# EAGLE board talkie (EAGLE 9.1.0)
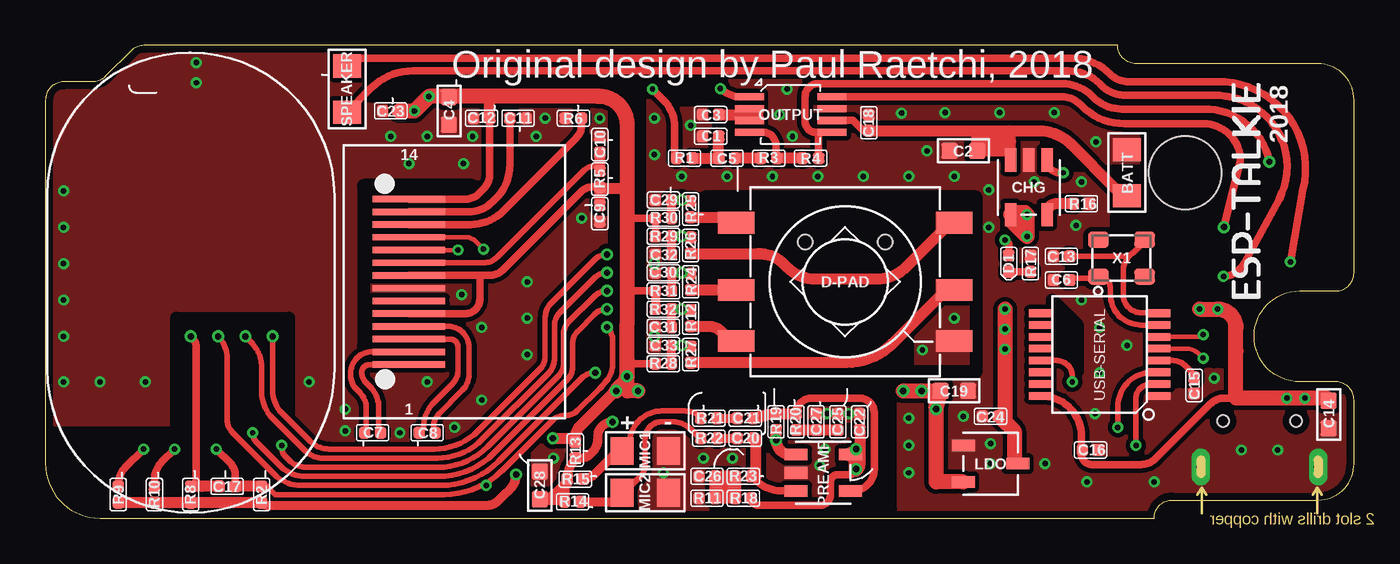
[diagram p0: board, top side]
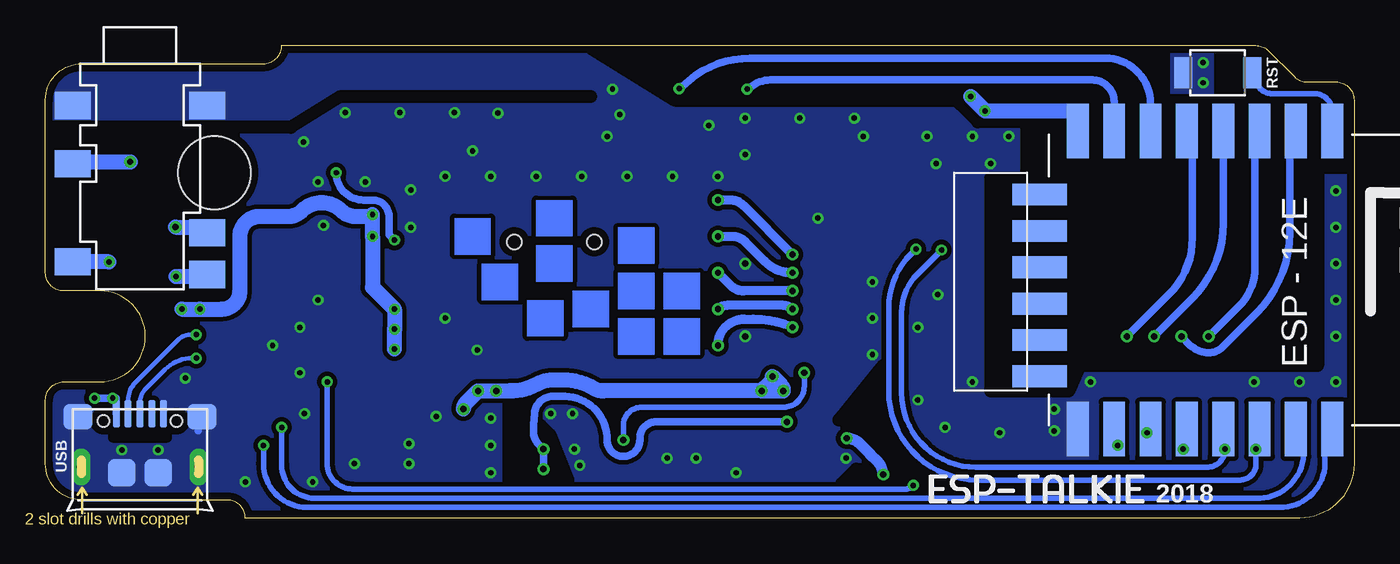
[diagram p1: board, bottom side, seen from below]

Size 72 x 26 mm. Coordinates in mm from the lower left corner, seen from the top.
Outline: 72,3 72,6.5 arc90 71,7.5 69,7.5 arc-180 69,12.5 71,12.5 arc90 72,13.5 72,23 arc90 70,25 60,25 arc-90 59,26 5.41,26 arc45 4.71,25.71 3.29,24.29 arc-45 2.59,24 1,24 arc90 0,23 0,3 arc90 3,0 61,0 arc-90 62,1 70,1 arc90 72,3
Copper layers (1*16): Top 0.035mm / dielectric 0.92mm / Bottom 0.035mm
Design rules "default *": minimum track width 6mil, minimum drill 0.3mm, track to track 6mil, track to pad 6mil, pad to pad 6mil, via to via 6mil, smd to smd 6mil, copper to edge 16mil, drill to drill 6mil, minimum pad ring 6mil, minimum via ring 6mil, stop-mask expansion 4mil, vias tented up to drill 0mil, thermal gap 10mil
Net classes: 1 usb: width 0.152 mm, clearance 0.305 mm to class 0, clearance 0.203 mm
Holes 4 mm at 62.7,19
tKeepout: area 16.4,5.5 to 28.6,20.5
bKeepout: area 21,0 to 62,26
tRestrict: 31 lines
bRestrict: 26 lines

## Footprints (pad centres in the part's own frame; a part is rotated, then mirrored left to right if it is on the bottom)
R1206 = smd 1.27 x 1.524: 1 -1.27,0; 2 1.27,0
C0402 = smd 0.635 x 0.635: 1 0,0.445; 2 0,-0.445
C0603 = smd 0.889 x 0.889: 1 0,0.762; 2 0,-0.762
SOT-23-5 = smd 0.635 x 1.27: 1 -1,-1.5; 2 0,-1.5; 3 1,-1.5; 4 1,1.5; 5 -1,1.5
LED-0402 = smd 0.635 x 0.635: + -0.445,0; - 0.445,0
DPAD-10X10 = smd 2 x 1.2: 1 -6,3.25; 2 -6,0.45; 3 -6,-3.25; 4 6,3.25; 5 6,0.45; 6 6,-3.25 | hole 0.8: -2.2,-2.2; 2.2,-2.2
PJ-342-6P = smd 1.5 x 2: 2 2.3,-3.7; 3 2.3,3.7; 4 5.5,-3.7; 5 10.9,-3.7; 6 9.3,3.7; 7 11.6,3.7
SOT-23-3 = smd 0.635 x 1.27: 1 -1,-1.5; 2 1,-1.5; 3 0,1.5
ER-OLED0.49 = smd 0.35 x 4: P$1 1.45,2; P$2 2.15,2; P$3 2.85,2; P$4 3.55,2; P$5 4.25,2; P$6 4.95,2; P$7 5.65,2; P$8 6.35,2; P$9 7.05,2; P$10 7.75,2; P$11 8.45,2; P$12 9.15,2; P$13 9.85,2; P$14 10.55,2
8-MSOP = smd 0.4 x 1.6: 1 -0.975,-2.275; 2 -0.325,-2.275; 3 0.325,-2.275; 4 0.975,-2.275; 5 0.975,2.275; 6 0.325,2.275; 7 -0.325,2.275; 8 -0.975,2.275
R0402 = smd 0.635 x 0.635: 1 0,0.445; 2 0,-0.445
SW2-2.6-3.0X2.5X1.2+0.4MM = smd 1 x 1.7: 1 -1.9,0; 2 1.9,0
ESP12E-SMD = smd 3 x 1.2: ADC -8.3,3.8; CH_PD -8.3,1.8; GND 8.1,-8.2; GPIO0 8.1,-2.2; GPIO2 8.1,-4.2; GPIO4 8.1,-0.2; GPIO5 8.1,1.8; GPIO12 -8.3,-4.2; GPIO13 -8.3,-6.2; GPIO14 -8.3,-2.2; GPIO15 8.1,-6.2; GPIO16 -8.3,-0.2; RESET -8.3,5.8; RXD0 8.1,3.8; TXD0 8.1,5.8; VCC -8.3,-8.2 | smd 1.2 x 3: CS0 -4.8,-10.3; GPIO9 -0.8,-10.3; GPIO10 1.2,-10.3; MISO -2.8,-10.3; MOSI 3.2,-10.3; SCLK 5.2,-10.3
MICRO-USB5+4P-SMD-0.65-B = smd 0.381 x 1.524: 1 -1.3,-0.25; 2 -0.65,-0.25; 3 0,-0.25; 4 0.65,-0.25; 5 1.3,-0.25 | smd 1.6 x 1.397: S1 -3.4,-0.427; S6 3.4,-0.427 | drill 0.508 pad 1.016 long: S2 -3.226,-3.175; S5 3.226,-3.175 | smd 1.5 x 1.5: S3 -1,-3.5; S4 1,-3.5 | hole 0.635: -2,-0.65; 2,-0.65
16-SSOP = smd 0.42 x 1.3: 1 -2.275,-3.25; 2 -1.625,-3.25; 3 -0.975,-3.25; 4 -0.325,-3.25; 5 0.325,-3.25; 6 0.975,-3.25; 7 1.625,-3.25; 8 2.275,-3.25; 9 2.275,3.25; 10 1.625,3.25; 11 0.975,3.25; 12 0.325,3.25; 13 -0.325,3.25; 14 -0.975,3.25; 15 -1.625,3.25; 16 -2.275,3.25
X4-SMD-3.2X2.5X0.7MM = smd 1.143 x 0.889: 1 -1.27,-1.016; 2 1.27,-1.016; 3 1.27,1.016; 4 -1.27,1.016

## Placement (x,y rotation side)
BATT  BATT  [R1206]  59.5,19 90 top
C1  10nF  [C0402]  36.6,21 90 top
C2  10uF  [C0603]  50.5,20.2 90 top
C3  1uF  [C0402]  36.6,22.2 270 top
C4  10uF  [C0603]  22.2,22.4 180 top
C5  390nF  [C0402]  37.5,19.8 90 top
C6  18pF  [C0402]  55.9,13.1 90 top
C7  1uF  [C0402]  18,4.7 90 top
C8  1uF  [C0402]  21,4.7 270 top
C9  4.7uF  [C0402]  30.5,16.75 0 top
C10  4.7uF  [C0402]  30.5,20.55 180 top
C11  4.7uF  [C0402]  26,22 270 top
C12  4.7uF  [C0402]  24,22 90 top
C13  18pF  [C0402]  55.9,14.4 90 top
C14  10uF  [C0603]  70.6,5.7 180 top
C15  100nF  [C0402]  63.2,7.3 180 top
C16  100nF  [C0402]  57.5,3.75 270 top
C17  100nF  [C0402]  10,1.75 90 top
C18  4.7uF  [C0402]  45.3,21.75 0 top
C19  10uF  [C0603]  50,7 90 top
C20  4.7uF  [C0402]  38.5,4.4 270 top
C21  4.7uF  [C0402]  38.5,5.5 270 top
C22  100nF  [C0402]  44.8,5.3 0 top
C23  100nF  [C0402]  19,22.4 90 top
C24  4.7uF  [C0402]  52,5.6 270 top
C25  4.7uF  [C0402]  43.6,5.3 0 top
C26  4.7uF  [C0402]  36.4,2.3 270 top
C27  4.7uF  [C0402]  42.4,5.3 180 top
C28  10uF  [C0603]  27.2,1.8 0 top
C29  100nF  [C0402]  34,17.5 270 top
C30  100nF  [C0402]  34,13.5 90 top
C31  100nF  [C0402]  34,10.5 270 top
C32  100nF  [C0402]  34,14.5 90 top
C33  100nF  [C0402]  34,9.5 270 top
CHG  MCP73831T-2ACI/OT  [SOT-23-5]  54.1,18.2 180 top
D1  LED  [LED-0402]  53,14 270 top
D-PAD  D-PAD  [DPAD-10X10]  44,13 180 top
JACK  PJ-342  [PJ-342-6P]  66.8,25 270 bottom
LDO  MCP1700T  [SOT-23-3]  52,3 270 top
MIC1  [R1206]  33,3.7 180 top
MIC2  [R1206]  33,1.4 0 top
OLED  ER-OLED0.49  [ER-OLED0.49]  22,7 90 top
OUTPUT  LM4890  [8-MSOP]  41,22.2 270 top
PREAMP  MCP6001UT-I  [SOT-23-5]  42.8,2.5 270 top
R1  2.2K  [C0402]  35.16,19.8 90 top
R2  10k  [R0402]  11.9,1.3 0 top
R3  20K  [R0402]  39.8,19.8 90 top
R4  20K  [R0402]  42.1,19.8 90 top
R5  10k  [R0402]  30.5,18.65 0 top
R6  390k  [R0402]  29.05,22 90 top
R8  10k  [R0402]  8,1.3 180 top
R9  10k  [R0402]  4,1.3 0 top
R10  10k  [R0402]  6,1.3 180 top
R11  20K  [R0402]  36.4,1.1 270 top
R12  1K  [R0402]  35.5,11 180 top
R13  33R  [R0402]  29.15,3.75 180 top
R14  1K  [R0402]  29,0.9 90 top
R15  1K  [R0402]  29.15,2.15 270 top
R16  2.2K  [R0402]  57,17.3 90 top
R17  470R  [R0402]  54.2,14 180 top
R18  20K  [R0402]  38.4,1.1 270 top
R19  100K  [R0402]  40.2,5.3 0 top
R20  1K  [R0402]  41.3,5.3 180 top
R21  1K  [R0402]  36.5,5.5 270 top
R22  1K  [R0402]  36.5,4.4 270 top
R23  20K  [R0402]  38.4,2.3 90 top
R24  1K  [R0402]  35.5,13 0 top
R25  1K  [R0402]  35.5,17 180 top
R26  1K  [R0402]  35.5,15 0 top
R27  1K  [R0402]  35.5,9 180 top
R28  100K  [R0402]  34,8.5 90 top
R29  100K  [R0402]  34,15.5 270 top
R30  100K  [R0402]  34,16.5 90 top
R31  100K  [R0402]  34,12.5 270 top
R32  100K  [R0402]  34,11.5 90 top
RST  [SW2-2.6-3.0X2.5X1.2+0.4MM]  7.5,24.5 0 bottom
SPEAKER  SPEAKER  [R1206]  16.6,23.6 270 top
U2  [ESP12E-SMD]  7,13 270 bottom
USB  [MICRO-USB5+4P-SMD-0.65-B]  66.8,6 0 bottom
USB-SERIAL  CH340G  [16-SSOP]  58,9 90 top
X1  12MHz  [X4-SMD-3.2X2.5X0.7MM]  59.2,14.3 0 top

## Library data of the parts
BATT MIC1 MIC2 R2-R6 R8-R11 R18 R23 SPEAKER = Seeed-OPL-Resistor
C1 R1 = Seeed-OPL-Capacitor; MPN: CC0402KRX7R9BB103
C2 C14 C19 C28 = Seeed-OPL-Capacitor; MPN: CC0603KRX5R6BB106
C3 C7 C8 = Seeed-OPL-Capacitor; MPN: CC0402KRX5R6BB105
C4 = Seeed-OPL-Capacitor; MPN: CC0603KRX5R6BB475
C5 = Seeed-OPL-Capacitor; MPN: CC0402KRX5R6BB474
C6 C13 = Seeed-OPL-Capacitor; MPN: CC0402JRNPO9BN180
C9-C12 C18 C20 C21 C24-C27 = Seeed-OPL-Capacitor; MPN: CC0402MRX5R5BB475
C15-C17 C22 C23 C29-C33 = Seeed-OPL-Capacitor; MPN: CC0402KRX7R8BB104
CHG JACK LDO PREAMP = parts
D1 = Seeed-OPL-Diode; MPN: 16-219A/T2D-AR2T1QY/3T
D-PAD OUTPUT USB-SERIAL = talkie
OLED = ER-OLED0.49
R12 R14 R15 R21 R22 R24-R27 = Seeed-OPL-Resistor; MPN: RC0402JR-071K5L
R13 = Seeed-OPL-Resistor; MPN: RC0402FR-0733RL
R16 = Seeed-OPL-Resistor; MPN: RC0402JR-072K2L
R17 = Seeed-OPL-Resistor; MPN: RC0402FR-07470RL
R19 R28-R32 = Seeed-OPL-Resistor; MPN: RC0402FR-07100KL
R20 = Seeed-OPL-Resistor; MPN: RC0402JR-071KL
RST = Seeed-OPL-Switch
U2 = esp8266modules
USB = Seeed-OPL-Connector; MPN: ST-USB-001G
X1 = Seeed-OPL-crystal-osctllator_1

## Nets
3V3: C4.2 C9.1 C12.2 C19.1 C23.2 LDO.2 OLED.P$5 OLED.P$8 OLED.P$14 R2.2 R5.2 R8.1 R9.2 R10.1 R13.2 R28.1 R29.2 R30.1 R31.2 R32.1 U2.VCC
3V3A: C22.2 C28.2 PREAMP.5 R13.1 R14.1 R15.2 R18.1
ADC: PREAMP.1 R19.2 U2.ADC
AMP_EN: OUTPUT.1 U2.GPIO12
B1: D-PAD.4 R12.1
B2: D-PAD.5 R24.2
B3: D-PAD.6 R25.1
B4: D-PAD.3 R26.2
B5: D-PAD.2 R27.1
BOOT: C17.2 C33.1 R2.1 R27.2 R28.2 U2.GPIO0 USB-SERIAL.13
BTN1: C30.2 R24.1 R31.1 U2.GPIO15
BTN2: C31.1 R12.2 R32.2 U2.GPIO2
BTN3: C29.1 R25.2 R30.2 U2.GPIO14
BTN4: C32.2 R26.1 R29.1 U2.GPIO16
BYP: C3.1 OUTPUT.2 OUTPUT.3
C1N: C8.1 OLED.P$4
C1P: C8.2 OLED.P$3
C2N: C7.1 OLED.P$2
C2P: C7.2 OLED.P$1
DAC: OUTPUT.4 R3.2 R4.1
DM [usb]: USB-SERIAL.6 USB.2
DP [usb]: USB-SERIAL.5 USB.3
EN: C17.1 R8.2 U2.CH_PD
GND: BATT.2 C1.1 C2.1 C3.2 C4.1 C6.1 C9.2 C10.2 C11.1 C12.1 C13.1 C14.1 C15.1 C16.1 C18.1 C19.2 C22.1 C23.1 C24.2 C25.1 C26.2 C27.2 C28.1 C29.2 C30.1 C31.2 C32.1 C33.2 CHG.2 D-PAD.1 JACK.2 JACK.3 LDO.1 MIC1.1 MIC2.2 OLED.P$7 OUTPUT.7 PREAMP.2 R6.1 R11.2 R16.2 R17.2 RST.1 U2.GND USB-SERIAL.1 USB.5 USB.S1 USB.S2 USB.S3 USB.S4 USB.S5 USB.S6
HIGHPASS: C5.2 R3.1
INA: C21.1 PREAMP.4 R19.1 R20.2
INAG: C25.2 C27.1 R20.1
INB: C20.1 PREAMP.3 R23.2
IREF: OLED.P$12 R6.2
L: JACK.4 OUTPUT.5 R4.2
LED: D1.- R17.1
LOWPASS: C1.2 C5.1 R1.2
MIC1: MIC2.1 R14.2 R22.2
MIC2: MIC1.2 R15.1 R21.2
N$1: C21.2 R21.1
N$2: C20.2 R22.1
PROG: CHG.5 R16.1
PWM: R1.1 U2.GPIO13
R: JACK.6 OUTPUT.8
RES: C10.1 OLED.P$9 R5.1
RST: RST.2 U2.RESET
RXD: U2.RXD0 USB-SERIAL.3
SCL: OLED.P$10 R10.2 U2.GPIO4
SDA: OLED.P$11 R9.1 U2.GPIO5
SPK+: JACK.7 SPEAKER.2
SPK-: JACK.5 SPEAKER.1
STAT: CHG.1 D1.+
TXD: U2.TXD0 USB-SERIAL.2
V3: C15.2 USB-SERIAL.4
VBAT: BATT.1 C2.2 C18.2 CHG.3 OUTPUT.6
VBUS: C14.2 C16.2 C24.1 CHG.4 LDO.3 USB-SERIAL.16 USB.1
VCOM: C11.2 OLED.P$13
VGND: C26.1 R11.1 R18.2 R23.1
XI: C6.2 USB-SERIAL.7 X1.1
XO: C13.2 USB-SERIAL.8 X1.3

## Tracks (layer width: path | path; a pad name or v marks a point on that pad's centre or on a via)
3V3  (via drill 0.3, 0.35)
  Top 0.305: 30.5,18.22 arc-45 30.53,18.15 | C19.1 arc207 49,7
  Top 0.406: OLED.P$14 23.14,17.55 arc45 23.84,17.84 24.08,18.08 arc45 24.45,18.96 C12.2 | 23.9,13.35 24.1,13.35 24.44,13.35 arc45 25.14,13.64 29.43,17.93 arc-45 30.14,18.22 30.5,18.22 | OLED.P$5 23.1,11.25 arc90 23.9,12.05 23.9,13.35 | OLED.P$8 23.9,13.35 | R29.2 R30.1 32.2,16.5 32,16.7 | R31.2 32,12.5 | R28.1 32.2,8.5 32,8.7
  Top 0.508: R31.2 R32.1 | R2.2 arc45 12.28,0.7 24.26,0.7 arc45 24.93,0.98 25.15,1.2 25.61,1.66 arc45 25.9,2.36 v25.9,2.4
  Top 0.61: 30.5,17.8 30.5,18.22 | 30.5,17.8 R5.2 | R2.2 R8.1 R10.1 R9.2 | 30.53,18.15 32,18.15 | 24.45,23.2 24.45,23.1 C12.2 | C9.1 30.5,17.8 | v31.4,7 arc45 31.32,6.96 29.44,5.09 arc45 29.15,4.39 | R13.2 29.15,4.39 | v27.92,4.4 29.12,4.4 arc-45 29.15,4.39
  Top 0.813: 32,8.7 v32,7.8 32,7 v32.6,7 | 32,8.7 32,10.7 32,12.5 32,16.7 32,17.3 32,17.85 32,18.15 32,20.3 32,21.73 arc90 30.39,23.2 24.45,23.2 22.24,23.2 C4.2 22.16,23.2 v21.1,23.2 arc-45 21.06,23.16 v20.3,22.4 C23.2 | LDO.2 49,2 49,7 v47.2,7 | v49,6 C19.1 | 32,8.7 32,8.01 arc-45 31.71,7.31 v31.4,7
  Bottom 0.406: v27.92,4.4 v27.91,4.4
  Bottom 0.61: v25.9,2.4 arc-45 25.92,2.41 arc-45 26.21,3.11 26.6,3.5 26.7,3.6 27.21,4.11 arc-45 v27.91,4.4
  Bottom 0.813: U2.VCC 15.2,22.4 v20.3,22.4 v21.1,23.2 | v32.6,7 32.14,7.46 arc-45 v32,7.8 31.54,7.34 arc45 v31.4,7 v32.6,7 | v49,6 arc45 48.86,6.34 v48.2,7 46.51,7 arc-33 45,7.35 arc29 44.05,7.6 43.55,7.6 arc31 41.85,7.15 arc-31 41.3,7 v32.6,7
3V3A  (via drill 0.35)
  Top 0.406: R18.1 arc90 39.24,0.7 42.6,0.7 arc90 43.2,1.3 43.2,2 arc-90 43.6,2.4 44.2,2.4 arc90 44.8,3
  Top 0.508: R15.2 arc-45 29.15,3.22 R13.1 29.41,3.31 arc45 30,3.55 30.11,3.66 arc45 30.4,4.36 30.4,4.5 arc-90 v31.2,5.3
  Top 0.61: 28.55,1.8 R14.1 arc45 28.22,1.04 C28.2 | R15.2 28.71,1.95 28.55,1.8 | 27.38,1.04 arc45 28.09,1.33 28.55,1.8 | C22.2 44.8,3 44.8,2.9 arc-90 v44.6,2.7
  Top 0.813: PREAMP.5 arc-90 44.6,3.2 v44.6,2.7
  Bottom 0.406: v31.2,5.3 38.4,5.3 arc-90 39.3,4.4 39.3,4.3 arc180 41.1,4.3 arc-90 43.4,6.7 44,6.7 arc-90 45.1,5.75 45.15,5.15 45.15,4.76 arc-45 44.86,4.06 v44.6,3.8 v44.6,2.7
ADC  (via drill 0.35)
  Top 0.305: v30.25,8 30.21,8 arc45 29.51,7.71 24.93,3.13 arc-45 21.72,1.8 14.06,1.8 arc-45 12.6,2.4 10.29,4.71 arc-45 10,5.41 10,8.79 arc45 v9.5,10
  Top 0.61: R19.2 v40.2,4.3 arc90 41,3.5 PREAMP.1
  Bottom 0.305: v40.2,4.3 40.2,5.1 arc90 39.2,6.1 31.4,6.1 arc-90 30.25,7.25 v30.25,8
  Bottom 0.406: U2.ADC 3.55,20.95 3.55,15.66 arc45 5.36,11.29 7.24,9.41 arc45 7.99,9.1 arc45 9.02,9.52 v9.5,10
AMP_EN  (via drill 0.3)
  Top 0.406: v37.13,23.62 arc45 38.36,23.18 OUTPUT.1
  Bottom 0.406: U2.GPIO12 11.2,22.8 arc-90 13.7,25.3 33.23,25.3 arc-45 36.94,23.76 36.99,23.76 v37.13,23.62
B1
  Top 0.61: R12.1 36.48,10.56 arc-45 37.19,10.26 37.48,9.96 arc45 D-PAD.4
B2
  Top 0.406: D-PAD.5
  Top 0.61: R24.2 D-PAD.5
B3
  Top 0.406: 37.69,16.55 D-PAD.6
  Top 0.61: R25.1 37.69,16.55
B4
  Top 0.406: 49.8,16.25 D-PAD.3
  Top 0.61: R26.2 39.22,14.56 arc-45 40.65,13.96 40.81,13.8 arc45 42.36,13.16 45.72,13.16 arc45 47.41,13.86 49.8,16.25
B5
  Top 0.406: D-PAD.2 49.55,12.55
  Top 0.61: 49.55,12.55 46.6,9.6 arc-45 44.08,8.56 R27.1
BOOT  (via drill 0.3, 0.35)
  Top 0.254: v24.25,1.8 25.03,2.58 arc-45 25.11,2.61
  Top 0.305: R2.1 12.2,1.74 12.65,1.29 21.93,1.29 arc45 25.11,2.61 27.87,5.37 arc-45 28.55,5.65 28.64,5.65 arc45 29.26,5.91 30.48,7.12 arc6 30.95,7.65 arc40 31.2,8.55 31.2,9.79 arc45 30.96,10.44 v30.9,10.5 | USB-SERIAL.13 55.62,8.68 arc-90 56.5,7.8 v56.5,7.5
  Top 0.406: C17.2 arc-90 C17.2 10.44,2.34 arc45 10.15,3.05 v9.4,3.8 | C33.1 v35,9.5 35.06,9.44 R27.2
  Top 0.508: R28.2 C33.1
  Top 0.61: R2.1 C17.2
  Bottom 0.305: v56.5,7.5 56.5,3 arc-90 55.1,1.6 24.68,1.6 arc-45 24.29,1.76 v24.25,1.8 | 30.94,10.54 v30.9,10.5
  Bottom 0.508: v35,9.5 arc90 33.55,10.95 33.05,10.95 arc22 30.94,10.54
  Bottom 0.61: U2.GPIO0 9.2,4.4 arc-90 9.1,4.3 v9.4,3.8
BTN1  (via drill 0.3, 0.35)
  Top 0.305: v13,4 13,3.88 arc45 13.2,3.4 13.41,3.19 arc45 14.36,2.8 21.6,2.8 arc45 24.33,3.93 28.21,7.81 arc45 28.5,8.51 28.5,10.09 arc-45 28.79,10.79 30.22,12.22 arc-45 v30.9,12.5
  Top 0.406: 35.06,13.44 v35,13.5
  Top 0.508: R31.1 C30.2 v35,13.5 | R24.1 35.06,13.44
  Bottom 0.305: U2.GPIO15 13.2,4 arc-90 v13,4
  Bottom 0.508: v30.9,12.5 33.59,12.5 arc45 34.29,12.79 v35,13.5
BTN2  (via drill 0.3, 0.35)
  Top 0.305: v11.4,4.7 arc45 11.61,4.19 12.97,2.83 arc45 14.26,2.3 21.61,2.3 arc45 24.66,3.56 28.71,7.61 arc45 29,8.31 29,9.59 arc-45 29.29,10.29 30.22,11.22 arc-45 v30.9,11.5
  Top 0.406: 35.06,11.44 v35,11.5
  Top 0.508: C31.1 R32.2 v35,11.5 | R12.2 35.06,11.44
  Bottom 0.508: v30.9,11.5 arc-45 31.38,11.7 34.52,11.7 arc-45 v35,11.5
  Bottom 0.61: v11.4,4.7 arc-90 U2.GPIO2
BTN3  (via drill 0.35)
  Top 0.305: v30.9,14.5 arc45 30.22,14.22 27.79,11.79 arc45 27.5,11.09 27.5,8.91 arc-45 27.21,8.21 23.8,4.8 arc-45 21.39,3.8 15.61,3.8 arc-45 14.57,4.23 12.99,5.81 arc-45 12.5,7 v12.5,10
  Top 0.406: 35.06,17.45 v35,17.5
  Top 0.508: R30.2 C29.1 v35,17.5 | R25.2 35.06,17.45
  Bottom 0.406: U2.GPIO14 8.9,21 8.9,15.42 arc45 10.19,12.31 v12.5,10
  Bottom 0.508: v30.9,14.5 33.61,17.21 arc-45 34.31,17.5 v35,17.5
BTN4  (via drill 0.35)
  Top 0.305: v11,10 11.28,9.72 arc-45 11.9,8.23 11.9,6.94 arc45 12.49,5.51 14.31,3.69 arc45 15.26,3.3 21.54,3.3 arc45 24.03,4.33 27.71,8.01 arc45 28,8.71 28,10.59 arc-45 28.29,11.29 30.22,13.22 arc-45 v30.9,13.5
  Top 0.406: 35.06,15.44 v35,15.5
  Top 0.508: v35,15.5 R29.1 C32.2 | R26.1 35.06,15.44
  Bottom 0.406: v11,10 8.91,12.09 arc-45 7.2,16.21 U2.GPIO16
  Bottom 0.508: v35,15.5 34.21,15.5 arc45 33.51,15.21 32.44,14.14 arc-45 v30.9,13.5
BYP
  Top 0.305: OUTPUT.3 38.57,22.03 arc-45 38.5,22.2 arc-45 38.57,22.37 OUTPUT.2
  Top 0.61: C3.1 38.5,22.2 39.2,22.2
C1N
  Top 0.305: OLED.P$4 22.15,10.55 arc-90 23.3,9.4 23.3,7.91 arc-45 22.94,7.04 21.66,5.75 arc45 21.34,5.01 21.34,4.8 C8.1
C1P
  Top 0.305: OLED.P$3 22.25,9.85 arc-90 22.7,9.4 22.7,8.11 arc-45 22.41,7.41 21.41,6.41 arc45 20.8,4.95 C8.2
C2N
  Top 0.305: OLED.P$2 17.95,9.15 arc90 16.8,8 16.8,7.81 arc45 17.09,7.11 17.3,6.9 arc-45 17.66,6.04 17.66,4.8 C7.1
C2P
  Top 0.305: OLED.P$1 17.85,8.45 arc90 17.4,8 arc45 17.61,7.49 17.84,7.26 arc-45 18.34,6.04 18.34,4.8 C7.2
DAC
  Top 0.406: OUTPUT.4 39.48,21.23 arc-90 40.2,20.5 40.2,19.84 arc90 R3.2
  Top 0.61: R4.1 R3.2
DM  (via drill 0.3)
  Top 0.254: v63.7,10.1 arc-45 63.4,9.97 USB-SERIAL.6
  Bottom 0.254: USB.2 67.45,6.49 arc45 67.05,7.45 64.69,9.81 arc45 63.99,10.1 v63.7,10.1
DP  (via drill 0.3)
  Top 0.254: v63.7,8.8 63.47,9.03 arc45 62.76,9.32 USB-SERIAL.5
  Bottom 0.254: USB.3 66.8,6.34 arc45 66.47,7.13 65.53,8.07 65.42,8.18 arc45 63.92,8.8 v63.7,8.8
EN  (via drill 0.35)
  Top 0.406: C17.1 arc-90 C17.1 | 8.39,1.74 arc-45 8.3,1.97 8.3,9.38 arc45 8.07,9.93 v8,10
  Top 0.61: C17.1 8.6,1.74 8.39,1.74 R8.2
  Bottom 0.406: U2.CH_PD 5.45,21.05 5.45,13.8 arc45 6.34,11.66 v8,10
GND  (via drill 0.3, 0.35)
  Bottom 0.406: 63.6,5 63.6,4.8
  other vias: 35.5,21.6 22.9,12.3 29.5,16.5 42.5,18.8 40,18.8 37.5,18.8 35,18.8 33.5,22 34,2.5 30.5,22 27.5,22 57.75,5.75 21,21 3,7.5 59.5,9.5 55.5,22.3 1,7.5 1,18 1,16 1,14 1,12 1,10 40.8,23.6 41.1,21 64.3,7.7 47.11,22.27 49.5,22.3 52.5,22.3 57.8,20.7 16.5,6 65.8,3.75 67.8,3.75 19,21 54.4,18.5 51.9,16 47.5,18.8 45,18.8 33.5,20 50,18.8 51.9,18.05 56.7,16.1 57,12 23.5,21 37.8,3.3 36.2,3.3 27.95,3.3 50.5,5.6 52,4.1 52,3 19.5,4.7 26.5,9 55,3 61,2 58,8 48.5,20.2 14.5,7.5 22.5,5 43,5.75 44.2,5.75 42.6,2.9 42.9,3.8 23,19.5 16.5,4.8 57.3,2 40.4,22.2 33.5,10 33.5,14 26.5,11 26.5,13 24,6.5 24,10.5 21,7.5 5.5,7.5 27,21 20,19.5 47.5,2.5 47.5,5.5 47.5,4 48.25,9.25 58,10.5 50,11 8.3,23.95 8.3,25.05 57,18.5
  pour Top (isolate 0.254, no thermals): 0,1 0,25 1,26 47,26 70,26 72,24 72,16 72,2 70,0 1,0
  pour Bottom (isolate 0.254, no thermals): 0,26 0,0 70,0 72,2 72,16 72,21 72,24 70,26 47,26
HIGHPASS
  Top 0.61: R3.1 C5.2
INA
  Top 0.305: PREAMP.4 44.4,1.5
  Top 0.406: 44.4,1.5 arc90 45.6,2.7 45.6,5.8 arc90 44.8,6.6 42.16,6.6 arc90 R20.2
  Top 0.61: C21.1 39.07,5.5 arc-20 R19.1 R20.2
INAG
  Top 0.61: R20.1 C27.1 C25.2
INB
  Top 0.406: R23.2 38.84,2.4 arc60 40.65,1.5 PREAMP.3
  Top 0.61: R23.2 arc90 38.84,2.4 R23.2 | R23.2 39.1,2.3 39.1,4.34 arc90 C20.1
IREF
  Top 0.406: OLED.P$12 23.39,16.15 arc45 25.2,16.9 29.2,20.9 arc45 29.49,21.61 R6.2
L  (via drill 0.35)
  Top 0.406: R4.2 42.54,21.18 42.5,21.23 | OUTPUT.5 42.5,21.23 | 42.5,21.23 42.38,21.23 arc-90 41.8,21.8 41.8,23.2 arc-90 42.5,23.9 55.8,23.9 55.94,23.9 arc-45 57.58,23.22 57.65,23.15 arc45 59.21,22.5 | 59.21,22.5 arc45 59.21,22.5 | 59.21,22.5 63.7,22.5 arc-80 67.34,19.63 v67.34,19.6
  Bottom 0.813: v67.34,19.6 70.4,19.6 JACK.4
LED
  Top 0.406: D1.- 53.6,13.56 R17.1
LOWPASS
  Top 0.61: C1.2 37.04,19.83 arc45 C5.1 R1.2
MIC1
  Top 0.305: R22.2 36.06,4.34 35.51,4.89 arc45 34.52,5.3 33.9,5.3 arc90 33,4.4 33,2.98 arc-45 32.71,2.28 31.83,1.4 MIC2.1
  Top 0.508: R14.2 31.43,0.9 MIC2.1
MIC2
  Top 0.305: MIC1.2 32.13,4.1 arc-90 33.93,5.9 34.6,5.9 35.16,5.9 arc-45 36.12,5.5 R21.2
  Top 0.508: R15.1 29.65,2.21 arc45 30.26,2.46 31.5,3.7 MIC1.2
N$1
  Top 0.508: R21.1 C21.2
N$2
  Top 0.508: R22.1 C20.2
PROG
  Top 0.61: R16.1 55.63,17.3 arc90 55.1,16.77 CHG.5
PWM  (via drill 0.3)
  Top 0.406: v33.4,23.6 34.03,22.97 arc-45 34.62,21.55 34.62,19.9 R1.1
  Bottom 0.406: U2.GPIO13 13.2,22.9 arc-90 14.4,24.1 32.12,24.1 arc-45 33.33,23.6 v33.4,23.6
R  (via drill 0.35)
  Top 0.406: OUTPUT.8 55.91,23.18 arc-45 56.96,22.74 57.04,22.66 arc45 59.36,21.7 63.71,21.7 arc-90 65.75,19.66 v64.84,16.01
  Bottom 0.813: v64.84,16.01 63.41,16.01 JACK.6
RES
  Top 0.305: OLED.P$9 24.14,14.05 arc45 24.84,14.34 29.61,19.11 arc-45 30.31,19.4 30.5,19.4
  Top 0.61: R5.1 30.5,19.4 C10.1
RST
  Bottom 0.305: U2.RESET 1.2,22.35 arc-90 2.2,23.35 4.49,23.35 arc45 5.19,23.64 5.4,23.85 arc45 5.6,24.33 RST.2
RXD  (via drill 0.3)
  Top 0.305: v59,5 59,6.12 arc-90 60.9,8.03 USB-SERIAL.3
  Bottom 0.152: U2.RXD0 3.2,4.5 arc90 2.78,3.98
  Bottom 0.305: v59,5 59,2.91 arc-90 57.19,1.1 5.18,1.1 arc-90 2.78,3.72 2.78,3.98
SCL  (via drill 0.3)
  Top 0.254: v22.7,14.75 OLED.P$10
  Top 0.406: R10.2 6,2.1 arc-45 6.42,3.12 v7.1,3.8
  Bottom 0.305: v22.7,14.75 24.03,13.42 arc-45 24.9,11.32 24.9,6.9 arc-90 20.8,2.8 8.1,2.8 arc-90 v7.1,3.8
  Bottom 0.61: v7.1,3.8 7.1,4.8 U2.GPIO4
SDA  (via drill 0.3)
  Top 0.254: OLED.P$11 22,15.45 23.14,15.45 arc-45 23.67,15.23 v24.1,14.8
  Top 0.406: R9.1 4,1.8 arc-45 4.42,2.82 v5.4,3.8
  Bottom 0.305: v24.1,14.8 24.38,14.52 arc-45 25.6,11.57 25.6,7 arc-90 20.7,2.1 6.27,2.1 arc-90 5.4,2.97 v5.4,3.8
  Bottom 0.61: U2.GPIO5 5.2,3.9 arc-90 5,3.7 5.3,3.7 v5.4,3.8
SPK+  (via drill 0.3)
  Top 0.406: v64.81,13.3 arc60 65.95,14.03 67.88,17.55 arc120 64.21,23.25 59.44,23.25 arc-45 58.09,23.8 58.02,23.88 arc45 56.29,24.6 20.2,24.6 arc45 17.93,23.66 SPEAKER.2
  Bottom 0.813: v64.81,13.3 63.2,13.3 JACK.7
SPK-  (via drill 0.3)
  Top 0.406: SPEAKER.1 16.66,24.93 arc-45 17.56,25.3 56.49,25.3 arc-45 58.56,24.44 58.57,24.43 arc45 59.61,24 64.89,24 arc-100 69.19,18.06 68.53,14.2 v68.5,14.1
  Bottom 0.813: v68.5,14.1 JACK.5
STAT  (via drill 0.3)
  Top 0.406: D1.+ 53,15.1 v52.8,15.3 | v56,19 55.8,19 arc-90 CHG.1
  Bottom 0.406: v56,19 arc-90 54.5,17.5 54,17.5 arc90 53.1,16.6 53.1,15.6 v52.8,15.3
TXD  (via drill 0.3)
  Top 0.305: v60,4 60,6.58 arc-90 60.8,7.38 USB-SERIAL.2
  Bottom 0.152: U2.TXD0 1.6,4.4
  Bottom 0.305: 1.6,4.4 1.6,3 arc90 4.11,0.6 5.3,0.6 57.6,0.6 arc90 60,3 v60,4
V3
  Top 0.254: 63.26,7.84 63.26,7.8 C15.2
  Top 0.305: 63.26,7.84 62.72,8.38 arc45 62.01,8.68 USB-SERIAL.4
VBAT
  Top 0.406: OUTPUT.6 44.42,21.88 44.99,21.3 C18.2
  Top 0.61: C18.2 51.3,21.3 | 51.3,21.3 53,21.3 | 53,21.3 54.67,21.3 arc-45 56.42,20.58 58.84,18.16 arc45 59.31,17.9 59.8,17.9 | CHG.3 53.1,20.2 | 53.1,20.2 53.1,20.7 | 53.1,20.7 53.1,21.21 arc90 53,21.3 | 53.1,20.2 C2.2 51.26,20.8 | 51.26,20.8 51.26,21.27 arc-90 51.3,21.3 | 51.26,20.8 53,20.8 arc-90 53.1,20.7
  Top 0.813: BATT.1 arc45 59.72,17.82 59.8,17.9
VBUS  (via drill 0.3)
  Top 0.305: USB-SERIAL.16 54.77,6.72
  Top 0.4: 54.77,6.72 arc-90 57,4.5 57,3.81
  Top 0.406: 57,3.81 arc90 C16.2 57.01,3.7 57.01,3.55 arc90 57.55,2.95 60.27,2.95 arc45 61.09,3.29 64.07,6.27 arc-45 64.87,6.6 65.5,6.6 | C24.1 52.8,5.4
  Top 0.508: 53.3,3.1 53.4,3.1 LDO.3
  Top 0.61: v63.5,11.5 v64.5,11.5 | v63.5,11.5 v64.5,11.5 | v63.5,11.5 v64.5,11.5 | v63.5,11.5 v64.5,11.5 | v63.5,11.5 v64.5,11.5 | v63.5,11.5 v64.5,11.5 | v63.5,11.5 v64.5,11.5 | v63.5,11.5 v64.5,11.5 | v63.5,11.5 v64.5,11.5 | v63.5,11.5 v64.5,11.5 | v63.5,11.5 v64.5,11.5 | v63.5,11.5 v64.5,11.5 | v63.5,11.5 v64.5,11.5 | v63.5,11.5 v64.5,11.5 | v63.5,11.5 v64.5,11.5 | v63.5,11.5 v64.5,11.5 | v63.5,11.5 v64.5,11.5 | 52.8,5.4 52.6,5.6
  Top 0.813: v69.3,6.6 68.8,6.6 | 68.8,6.6 65.5,6.6 65.5,9.2 65.5,10.5 arc90 v64.5,11.5 | C14.2 arc90 70.46,6.6 68.8,6.6 | v63.5,11.5 v64.5,11.5 | v63.5,11.5 v64.5,11.5 | v63.5,11.5 v64.5,11.5 | 53.2,16.3 v54,15.5 v54,16.7 53.9,16.8 53.2,16.8 CHG.4 | 52.6,5.6 52.6,5.5 53.3,4.8 53.3,3.1 | v52.8,11.5 52.8,5.4
  Bottom 0.305: v68.3,6.6 68.1,6.6
  Bottom 0.406: USB.1 68.1,6.6 v69.3,6.6
  Bottom 0.813: v64.5,11.5 v63.5,11.5 62.3,11.5 arc-90 61.3,12.5 61.3,15.5 arc90 60.2,16.6 58.61,16.6 arc-45 57.91,16.89 57.9,16.9 arc90 55.7,16.9 arc-45 54.98,16.6 54.1,16.6 v54,16.7 v54,15.5 54,12.7 v52.8,11.5 | v52.8,11.5 v52.8,10.4 v52.8,9.3 | v52.8,11.5 52.8,10.3 v52.8,11.5
VCOM
  Top 0.406: OLED.P$13 23.28,16.85 arc45 24.6,17.4 24.79,17.59 arc45 25.55,19.43 C11.2
VGND
  Top 0.61: 37.3,2.3 R23.1 37.96,1.6 | 37.3,2.3 C26.1 R11.1 37.4,1.1 | 37.96,1.6 R18.2 37.4,1.1 | 37.3,2.3 37.3,1.2 arc90 37.4,1.1 | 37.3,2.3 37.3,2.26 arc90 37.96,1.6
XI
  Top 0.305: C6.2 56.34,13.18 56.36,13.18 57.83,13.18 X1.1 arc-90 58.6,12.61 58.6,12.3 arc90 60.27,10.62 USB-SERIAL.7
XO
  Top 0.305: C13.2 59.34,14.4 arc45 59.95,14.69 60.28,15.02 | X1.3 60.28,15.12 60.28,15.02 | 60.28,15.02 59.59,14.34 arc45 59.3,13.63 59.3,12.3 arc90 60.3,11.3 61.23,11.3 arc-90 USB-SERIAL.8
(copper drawn outside any net)
  shapes: Bottom area x11

## Text on the board
tPlace: Original design by Paul Raetchi, 2018 | 2018 | 14 | 1 | + | -
bPlace: 2018